# Altium PCB rev.PcbDoc
Units mm, origin at the board's own origin, x right, y up, seen from the top; angles counter-clockwise.
Board outline 145 x 50 mm, 2 copper layers (Top Layer, Bottom Layer); 30 components, 27 nets, 104 pads, 26 vias.
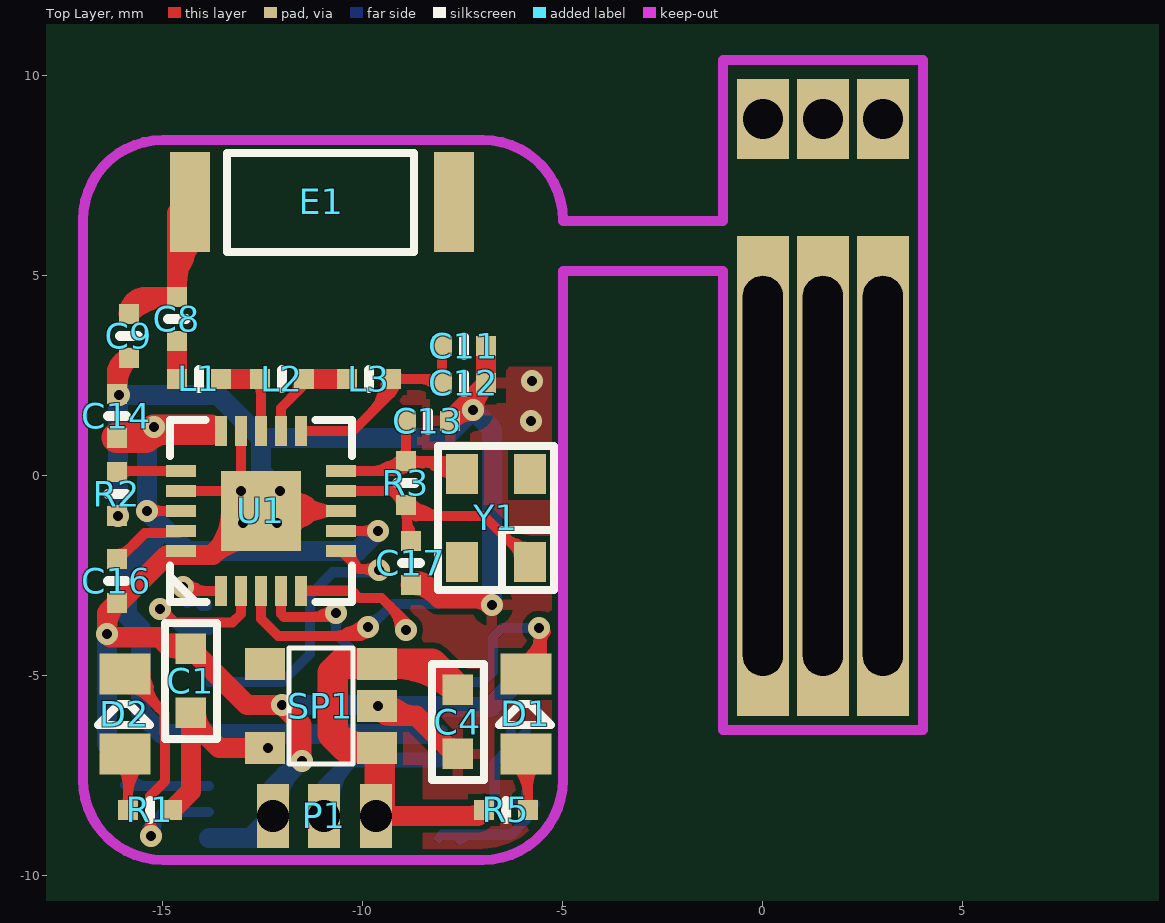
[diagram p0: Top Layer view]
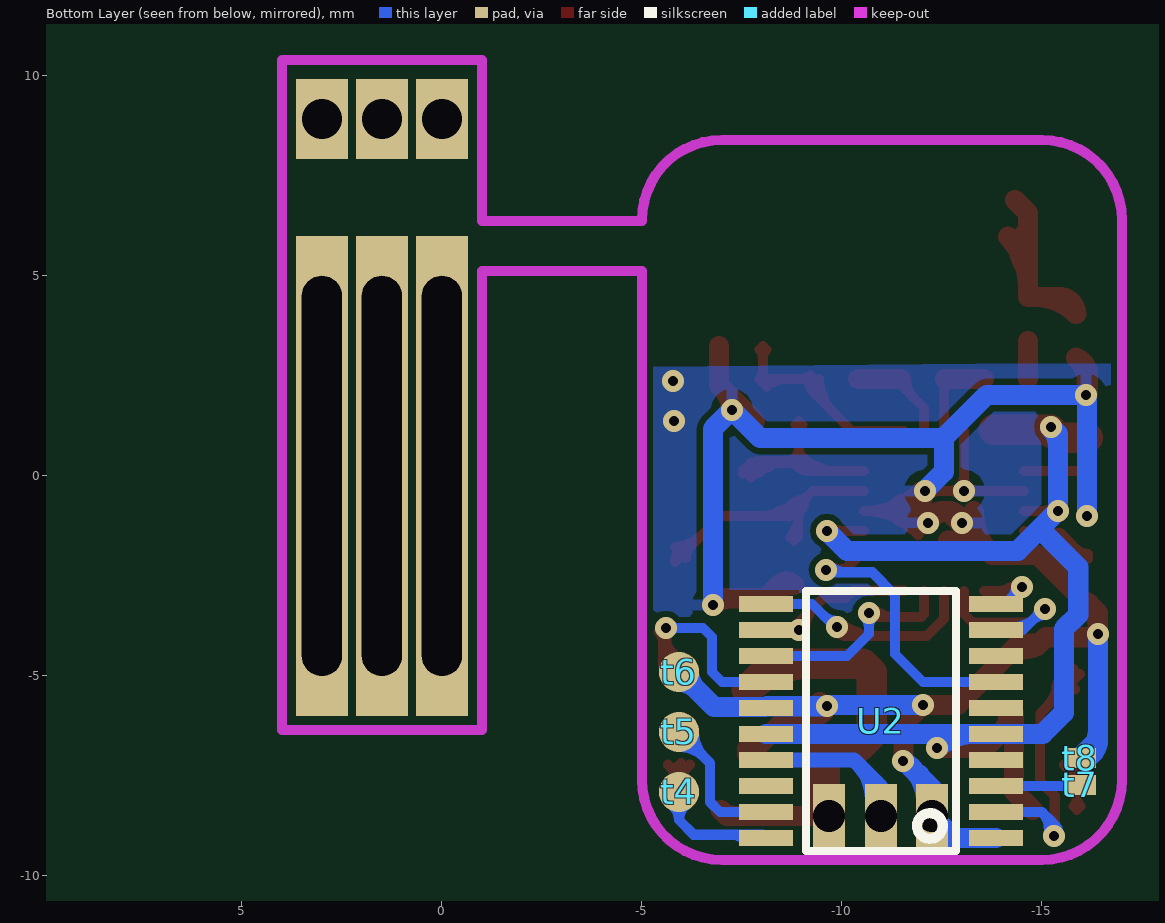
[diagram p1: Bottom Layer view, seen from below]

## Layer stack, top to bottom
Top Layer: signal copper 0.0356
Dielectric: dielectric 0.32, FR-4, Dk 4.8
Bottom Layer: signal copper 0.0356

## Board outline
-22,-14.6 -22,35.4 123,35.4 123,-14.6

## Design rules (kind name [scope] priority, off if disabled: settings)
AssemblyTestPointUsage [All] p1 off:
AssemblyTestpoint [All] p1 off: testpointundercomponent=TRUE minsize=1.016 maxsize=2.54 preferedsize=1.524 minholesize=0 maxholesize=1.016 preferedholesize=0.813 testpointgrid=0.025 usegrid=TRUE gridtolerance=0 allowsidetop=TRUE allowsidebottom=TRUE
Clearance [All] p1: gap=0.152
ComponentClearance [All] p1 off: gap=0.254 collisioncheckmode=3 verticalgap=0.254 showdistances=FALSE
FabricationTestPointUsage [All] p1 off: valid=0 allowmultiple=FALSE
FabricationTestpoint [All] p1 off: side=3 testpointundercomponent=TRUE minsize=1.016 maxsize=2.54 preferedsize=1.524 minholesize=0 maxholesize=1.016 preferedholesize=0.813 testpointgrid=0.025 allowsidetop=TRUE allowsidebottom=TRUE usegrid=TRUE gridtolerance=0
Height [All] p1 off: minheight=0 maxheight=25.4 prefheight=12.7
HoleToHoleClearance [All] p1: gap=0.254 allowstackedmicrovias=FALSE
MinimumSolderMaskSliver [All] p1 off: minsoldermaskwidth=0.254
PolygonConnect [All] p1: connectstyle=Relief reliefconductorwidth=0.254 reliefentries=4 polygonreliefangle="90 Angle" airgapwidth=0.254
RoutingVias [All] p1: holewidth=0.25 width=0.55 viastyle="Through Hole" minholewidth=0.25 minwidth=0.55 maxholewidth=0.711 maxwidth=1.27
SilkToSilkClearance [All] p1 off: silktosilkclearance=0.254
SilkToSolderMaskClearance [IsPad] p1 off: minsilkscreentomaskgap=0.254 clearancetoexposedcopper=TRUE
SolderMaskExpansion [All] p1: expansion=0.102
Width [All] p1: maxlimit=2.54 minlimit=0.178 preferedwidth=0.178 minimp=50.000000 maximp=50.000000 favimp=50.000000
18 further rules are at their usual default settings.

## Components (designator, comment, footprint, x,y, rotation, side; value= is the part's Value field where it differs from the comment)
C1 "22uf" 0603R -14.3,-5.925 r90 top
C4 "22uf" 0603R -7.625,-5.35 r270 top
C8 "1.5pF" 0402 -14.65,3.375 r90 top
C9 "1.0pF" 0402 -15.85,2.95 r90 top
C11 "2.2nF" 0402 -6.925,3.25 r180 top
C12 "4.7pF" 0402 -6.925,2.325 r180 top
C13 "22pF" 0402 -7.825,1.375 r180 top
C14 "10nF" 0402 -16.15,2.05 r270 top
C16 "33nF" 0402 -16.15,-3.175 r90 top
C17 "22pF" 0402 -8.8,-2.725 r90 top
D1 "LED-R" LED -5.925,-6.95 r90 top
D2 "LED-G" LED -15.95,-6.95 r90 top
E1 "Antenna" ANT6520 -14.325,6.85 r0 top
L1 "3.9nH" 0402 -13.55,2.425 r180 top
L2 "8.2nH" 0402 -11.475,2.425 r180 top
L3 "2.7nH" 0402 -9.3,2.425 r180 top
P1 "head*3" "head*3 - duplicate" -13.85,-7.2 r90 top
R1 "R1K" 0402 -14.775,-8.35 r180 top
R2 "22K" 0402 -16.15,0.1 r270 top
R3 "R1M" 0402 -8.925,0.375 r270 top
R5 "R1K" 0402 -6.975,-8.35 r0 top
SP1 "SP6201-adj" SOT23-5 -9.65,-6.8 r90 top
t4 "TP" TESTPOINT#1 -2.9,-8.275 r0 top
t5 "TP" TESTPOINT#2 -5.9,-6.675 r180 bottom
t6 "TP" TESTPOINT#3 -0.175,-3.875 r0 top
t7 "TP" TESTPOINT#4 4.9,-13.175 r0 top
t8 "TP" TESTPOINT#5 2.925,-8.725 r0 top
U1 "NRF24l01" QFN20-4X4 -13.55,-2.875 r90 top
U2 "STM32F030F3" TSSOP20 -13.85,-9.05 r90 bottom
Y1 "16M" XTAL3225 -5.525,-2.55 r90 top

## Footprints (in the part's own frame and the unit in brackets; to place one, negate y for a bottom-side part, rotate by r counter-clockwise, add the part's x,y. Pads: shape width x height; smd on the part's side, far side on the other; paste and mask are expansions set on the pad)
0402 [mm]
  rect 0.5x0.5 smd: 1(0,0) 2(1.1,0)
  silkscreen extent 0.55,-0.23 0.55,0.23
0603R [mil]
  rect 30x30 smd: 1(0,0) 2(62.99,0)
  silkscreen extent -26,-26 89,26
ANT6520 [mm]
  rect 1x2.5 smd: 1(0,0) 2(6.6,0)
  silkscreen extent 0.92,-1.25 5.6,1.22
"head*3 - duplicate" [mm]
  rect 1.6x0.8 hole 0.8: 1(-1.3,-1.6) 2(-1.3,-2.875) 3(-1.3,-4.175)
LED [mil]
  rect 40x50 smd: 1(0,0) 2(78.74,0)
  silkscreen extent 29,-25 49,27
QFN20-4X4 [mm]
  rect 2x2 smd: 0(2,-1)
  rect 0.75x0.3 smd: 1(0,0) 2(0,-0.5) 3(0,-1) 4(0,-1.5) 5(0,-2) 11(4,-2) 12(4,-1.5) 13(4,-1) 14(4,-0.5) 15(4,0)
  rect 0.3x0.75 smd: 6(1,-3) 7(1.5,-3) 8(2,-3) 9(2.5,-3) 10(3,-3) 16(3,1) 17(2.5,1) 18(2,1) 19(1.5,1) 20(1,1)
  silkscreen extent -0.28,-3.27 4.27,1.28
SOT23-5 [mm]
  rect 0.8x1 smd: 1(0,0) 2(1.05,0) 3(2.1,0) 4(2.1,2.8) 5(0,2.8)
  silkscreen extent -0.4,0.6 2.5,2.2
TESTPOINT#1 [mm]
  round 1 smd far side: 1(-3.025,0.375)
TESTPOINT#2 [mm]
  round 1 smd: 1(0.025,0.275)
TESTPOINT#3 [mm]
  round 1 smd far side: 1(-5.75,-1.025)
TESTPOINT#4 [mm]
  rect 0.8x0.5 smd far side: 1(-20.85,5.45)
TESTPOINT#5 [mm]
  rect 0.8x0.5 smd far side: 1(-18.875,1.675)
TSSOP20 [mm]
  rect 0.4x1.35 smd: 1(0,0) 2(0.65,0) 3(1.3,0) 4(1.95,0) 5(2.6,0) 6(3.25,0) 7(3.9,0) 8(4.55,0) 9(5.2,0) 10(5.85,0) 11(5.85,5.75) 12(5.2,5.75) 13(4.55,5.75) 14(3.9,5.75) 15(3.25,5.75) 16(2.6,5.75) 17(1.95,5.75) 18(1.3,5.75) 19(0.65,5.75) 20(0,5.75)
  silkscreen extent -0.33,1 6.17,4.75
XTAL3225 [mm]
  rect 1x0.8 smd: 1(0.4,0.3) 2(2.6,0.3) 3(2.6,2) 4(0.4,2)
  silkscreen extent -0.3,-0.3 3.3,2.6

## Part data
C1 C4: library part C100uF
C8 C9 C11 C12 C13 C14 C16 C17: library part C0.1uF
D1 D2: library part LED
E1: "Generic Antenna"
L1 L2 L3: library part Inductor-100uH
R2 R3: library part R10K
SP1: library part SP6201
U2: library part STM32F030F4
Y1: library part CRYSTAL, "Crystal"

## Free pads (board coordinates)
  rect 1.3x12 hole 1 slot 10 at 90 deg: 0(0,0) 0(1.5,0) 0(3,0)
  rect 1.3x2 hole 1: 3(0,8.925) 4(1.5,8.925) 5(3,8.925)

## Via types
v1: diameter 0.55, hole 0.25, Top Layer to Bottom Layer, tented both sides, 24 vias
v2: diameter 0.55, hole 0.25, Top Layer to Bottom Layer, 2 vias

## Nets (pads, with @x,y where several pads share a name; then routed paths per layer and width w, separated by ;. In a path a pad name is that pad's centre, name@x,y a point inside that pad or via, vN(x,y) a via of type N, cw(c..) or ccw(c..) an arc to the next point about the centre after c; other vN are vias at no path point)
4V3: C4.1 P1.3 R5.1 SP1.1 SP1.3 | length 20.4
  Top Layer w0.254: R5.1 R5.1@-6.965,-8.34
  Top Layer w0.508: P1.3 -7.125,-8.5 R5.1 ; -7.328,-8.5 ccw(c-7.328,-7.998) R5.1@-6.972,-8.353 ; -7.328,-8.5 ccw(c-7.328,-7.998) R5.1@-6.972,-8.353 ; -7.328,-8.5 ccw(c-7.328,-7.998) R5.1@-6.972,-8.353
  Top Layer w0.762: P1.3@-9.675,-8.4 -9.575,-8.3 -9.575,-6.8 -10.4,-6.8 -10.75,-6.45 ; -10.75,-6.45 ccw(c-9.921,-5.621) SP1.1@-9.753,-6.781 ; -10.75,-6.45 ccw(c-9.921,-5.621) SP1.1@-9.753,-6.781 ; -10.75,-6.45 ccw(c-9.921,-5.621) SP1.1@-9.753,-6.781 ; -10.75,-6.45 -10.75,-4.925 -10.525,-4.7 -8.275,-4.7 C4.1 ; SP1.3@-9.194,-4.7 cw(c-9.194,-6.919) C4.1 ; SP1.3@-9.194,-4.7 cw(c-9.194,-6.919) C4.1 ; SP1.3@-9.194,-4.7 cw(c-9.194,-6.919) C4.1
AD-BAT: U2.6
CE: U1.1 U2.10 | length 9.2
  Top Layer w0.254: v1(-14.5,-2.775) -14.4,-2.875 U1.1 ; v1@-14.395,-2.67 ccw(c-13.901,-2.176) -13.901,-2.875 ; v1@-14.395,-2.67 ccw(c-13.901,-2.176) -13.901,-2.875 ; v1@-14.395,-2.67 ccw(c-13.901,-2.176) -13.901,-2.875 ; v1@-14.379,-2.86 cw(c-14.239,-2.958) -14.154,-2.81 ; v1@-14.379,-2.86 cw(c-14.239,-2.958) -14.154,-2.81 ; v1@-14.379,-2.86 cw(c-14.239,-2.958) -14.154,-2.81
  Bottom Layer w0.254: U2.10@-13.9,-3.25 -14.025,-3.25 v1(-14.5,-2.775) ; v1@-14.502,-2.881 cw(c-14.624,-3.093) U2.10@-14.394,-3.175 ; v1@-14.502,-2.881 cw(c-14.624,-3.093) U2.10@-14.394,-3.175 ; v1@-14.502,-2.881 cw(c-14.624,-3.093) U2.10@-14.394,-3.175 ; v1@-14.5,-2.923 cw(c-14.5,-3.28) U2.10@-14.247,-3.028 ; v1@-14.5,-2.923 cw(c-14.5,-3.28) U2.10@-14.247,-3.028 ; v1@-14.5,-2.923 cw(c-14.5,-3.28) U2.10@-14.247,-3.028 ; v1(-14.5,-2.775) cw(c-14.791,-3.066) U2.10@-14.395,-3.18 ; v1(-14.5,-2.775) cw(c-14.791,-3.066) U2.10@-14.395,-3.18 ; v1(-14.5,-2.775) cw(c-14.791,-3.066) U2.10@-14.395,-3.18 ; v1@-14.39,-2.852 ccw(c-13.973,-2.859) U2.10@-14.273,-3.149 ; v1@-14.39,-2.852 ccw(c-13.973,-2.859) U2.10@-14.273,-3.149 ; v1@-14.39,-2.852 ccw(c-13.973,-2.859) U2.10@-14.273,-3.149 ; v1@-14.352,-2.775 ccw(c-13.995,-2.775) U2.10@-14.247,-3.028 ; v1@-14.352,-2.775 ccw(c-13.995,-2.775) U2.10@-14.247,-3.028 ; v1@-14.352,-2.775 ccw(c-13.995,-2.775) U2.10@-14.247,-3.028
CSN: U1.2 U2.9 | length 10.4
  Top Layer w0.254: v1@-15.062,-3.313 -14.71,-3.665 -13.265,-3.665 -13.05,-3.45 U1.2 ; v1@-15.075,-3.473 cw(c-15.075,-3.891) -14.78,-3.595 ; v1@-15.075,-3.473 cw(c-15.075,-3.891) -14.78,-3.595 ; v1@-15.075,-3.473 cw(c-15.075,-3.891) -14.78,-3.595 ; v1@-14.927,-3.325 ccw(c-14.63,-3.325) -14.84,-3.535 ; v1@-14.927,-3.325 ccw(c-14.63,-3.325) -14.84,-3.535 ; v1@-14.927,-3.325 ccw(c-14.63,-3.325) -14.84,-3.535
  Bottom Layer w0.254: v1@-15.062,-3.313 -14.525,-3.85 U2.9 ; -14.541,-3.734 ccw(c-14.406,-3.599) U2.9@-14.347,-3.781 ; v1@-15.075,-3.473 cw(c-15.075,-3.891) -14.78,-3.595 ; v1@-15.075,-3.473 cw(c-15.075,-3.891) -14.78,-3.595 ; v1@-15.075,-3.473 cw(c-15.075,-3.891) -14.78,-3.595 ; v1@-14.927,-3.325 ccw(c-14.63,-3.325) -14.84,-3.535 ; v1@-14.927,-3.325 ccw(c-14.63,-3.325) -14.84,-3.535 ; v1@-14.927,-3.325 ccw(c-14.63,-3.325) -14.84,-3.535 ; -14.791,-3.584 ccw(c-14.325,-3.118) U2.9@-14.325,-3.777 ; -14.791,-3.584 ccw(c-14.325,-3.118) U2.9@-14.325,-3.777 ; -14.791,-3.584 ccw(c-14.325,-3.118) U2.9@-14.325,-3.777 ; -14.641,-3.692 cw(c-14.749,-4.095) U2.9@-14.388,-3.887 ; -14.641,-3.692 cw(c-14.749,-4.095) U2.9@-14.388,-3.887 ; -14.641,-3.692 cw(c-14.749,-4.095) U2.9@-14.388,-3.887
  other v1: -15.075,-3.325
GND: C1.2 C4.2 C9.1 C11.1 C12.1 C13.1 C14.1 C16.1 C17.1 P1.1 R2.2 SP1.2 t6.1 t8.1 U1.0 U1.8 U1.14 U1.17 U1.20 U2.1 U2.15 | length 186.3
  Top Layer w0.254: R2.2 v1(-16.125,-1) ; U1.17 v1(-13.05,-0.375) ; U1.14 v1(-13.05,-0.375) ; U1.0@-13.407,-0.375 ccw(c-13.407,-0.018) U1.0@-13.155,-0.27 ; U1.0@-13.407,-0.375 cw(c-13.407,-0.732) U1.0@-13.155,-0.48 ; U1.0@-13.407,-0.375 ccw(c-13.407,-0.018) U1.0@-13.155,-0.27 ; U1.0@-13.407,-0.375 cw(c-13.407,-0.732) U1.0@-13.155,-0.48 ; U1.0@-13.407,-0.375 ccw(c-13.407,-0.018) U1.0@-13.155,-0.27 ; U1.0@-13.407,-0.375 cw(c-13.407,-0.732) U1.0@-13.155,-0.48 ; U1.0@-13.155,-0.27 ccw(c-13.407,-0.018) U1.0@-13.05,-0.018 ; U1.0@-13.155,-0.27 ccw(c-13.407,-0.018) U1.0@-13.05,-0.018 ; U1.0@-13.155,-0.27 ccw(c-13.407,-0.018) U1.0@-13.05,-0.018 ; v1(-13.05,-0.375) v1(-12.075,-0.375) U1.0@-12.075,-0.875 ; U1.0@-13.05,-0.018 ccw(c-12.693,-0.018) U1.0@-12.945,-0.27 ; U1.0@-13.05,-0.018 ccw(c-12.693,-0.018) U1.0@-12.945,-0.27 ; U1.0@-13.05,-0.018 ccw(c-12.693,-0.018) U1.0@-12.945,-0.27 ; U1.0@-12.945,-0.48 cw(c-12.693,-0.732) U1.0@-12.693,-0.375 ; U1.0@-12.945,-0.48 cw(c-12.693,-0.732) U1.0@-12.693,-0.375 ; U1.0@-12.945,-0.48 cw(c-12.693,-0.732) U1.0@-12.693,-0.375 ; U1.0@-12.945,-0.27 ccw(c-12.693,-0.018) U1.0@-12.693,-0.375 ; U1.0@-12.945,-0.27 ccw(c-12.693,-0.018) U1.0@-12.693,-0.375 ; U1.0@-12.945,-0.27 ccw(c-12.693,-0.018) U1.0@-12.693,-0.375 ; U1.0@-12.432,-0.375 ccw(c-12.432,-0.018) U1.0@-12.18,-0.27 ; U1.0@-12.432,-0.375 cw(c-12.432,-0.732) U1.0@-12.18,-0.48 ; U1.0@-12.432,-0.375 ccw(c-12.432,-0.018) U1.0@-12.18,-0.27 ; U1.0@-12.432,-0.375 cw(c-12.432,-0.732) U1.0@-12.18,-0.48 ; U1.0@-12.432,-0.375 ccw(c-12.432,-0.018) U1.0@-12.18,-0.27 ; U1.0@-12.432,-0.375 cw(c-12.432,-0.732) U1.0@-12.18,-0.48 ; U1.0@-12.254,-1.07 ccw(c-12.688,-0.637) U1.0@-12.075,-0.637 ; U1.0@-12.254,-1.07 ccw(c-12.688,-0.637) U1.0@-12.075,-0.637 ; U1.0@-12.254,-1.07 ccw(c-12.688,-0.637) U1.0@-12.075,-0.637 ; U1.0@-12.234,-1.11 cw(c-11.793,-1.45) U1.0@-11.864,-0.898 ; U1.0@-12.234,-1.11 cw(c-11.793,-1.45) U1.0@-11.864,-0.898 ; U1.0@-12.234,-1.11 cw(c-11.793,-1.45) U1.0@-11.864,-0.898 ; U1.0@-12.234,-1.11 cw(c-11.793,-1.45) U1.0@-11.864,-0.898 ; U1.0@-12.234,-1.11 cw(c-11.793,-1.45) U1.0@-11.864,-0.898 ; U1.0@-12.234,-1.11 cw(c-11.793,-1.45) U1.0@-11.864,-0.898 ; U1.0@-12.225,-1.1 cw(c-11.682,-1.642) U1.0@-11.682,-0.875 ; U1.0@-12.225,-1.1 cw(c-11.682,-1.642) U1.0@-11.682,-0.875 ; U1.0@-12.225,-1.1 cw(c-11.682,-1.642) U1.0@-11.682,-0.875 ; U1.0@-12.217,-1.257 ccw(c-11.915,-0.888) U1.0@-11.649,-1.283 ; U1.0@-12.217,-1.257 ccw(c-11.915,-0.888) U1.0@-11.649,-1.283 ; U1.0@-12.217,-1.257 ccw(c-11.915,-0.888) U1.0@-11.649,-1.283 ; U1.0@-12.217,-1.257 ccw(c-11.915,-0.888) U1.0@-11.649,-1.283 ; U1.0@-12.217,-1.257 ccw(c-11.915,-0.888) U1.0@-11.649,-1.283 ; U1.0@-12.217,-1.257 ccw(c-11.915,-0.888) U1.0@-11.649,-1.283 ; U1.0@-12.195,-0.462 cw(c-12.546,-0.717) U1.0@-12.127,-0.83 ; U1.0@-12.195,-0.462 cw(c-12.546,-0.717) U1.0@-12.127,-0.83 ; U1.0@-12.195,-0.462 cw(c-12.546,-0.717) U1.0@-12.127,-0.83 ; U1.0@-12.192,-1.033 ccw(c-12.24,-0.875) U1.0@-12.075,-0.875 ; U1.0@-12.192,-1.033 ccw(c-12.24,-0.875) U1.0@-12.075,-0.875 ; U1.0@-12.192,-1.033 ccw(c-12.24,-0.875) U1.0@-12.075,-0.875 ; U1.0@-12.18,-0.48 cw(c-12.432,-0.732) U1.0@-12.075,-0.732 ; U1.0@-12.18,-0.48 cw(c-12.432,-0.732) U1.0@-12.075,-0.732 ; U1.0@-12.18,-0.48 cw(c-12.432,-0.732) U1.0@-12.075,-0.732 ; U1.0@-12.107,-1.033 ccw(c-11.883,-0.297) -11.498,-0.963 ; U1.0@-12.107,-1.033 ccw(c-11.883,-0.297) -11.498,-0.963 ; U1.0@-12.107,-1.033 ccw(c-11.883,-0.297) -11.498,-0.963 ; U1.0@-12.104,-1.034 ccw(c-11.91,-0.432) U1.0@-11.573,-0.967 ; U1.0@-12.104,-1.034 ccw(c-11.91,-0.432) U1.0@-11.573,-0.967 ; U1.0@-12.104,-1.034 ccw(c-11.91,-0.432) U1.0@-11.573,-0.967 ; U1.0@-12.104,-1.034 ccw(c-11.91,-0.432) U1.0@-11.573,-0.967 ; U1.0@-12.104,-1.034 ccw(c-11.91,-0.432) U1.0@-11.573,-0.967 ; U1.0@-12.104,-1.034 ccw(c-11.91,-0.432) U1.0@-11.573,-0.967 ; U1.0@-12.096,-1.296 cw(c-11.132,-2.19) -11.132,-0.875 ; U1.0@-12.096,-1.296 cw(c-11.132,-2.19) -11.132,-0.875 ; U1.0@-12.096,-1.296 cw(c-11.132,-2.19) -11.132,-0.875 ; U1.0@-12.096,-0.454 ccw(c-11.132,0.44) -11.132,-0.875 ; U1.0@-12.096,-0.454 ccw(c-11.132,0.44) -11.132,-0.875 ; U1.0@-12.096,-0.454 ccw(c-11.132,0.44) -11.132,-0.875 ; U1.0@-12.075,-0.875 U1.8 ; U1.0@-12.075,-0.732 cw(c-11.718,-0.732) U1.0@-11.97,-0.48 ; U1.0@-12.075,-0.732 cw(c-11.718,-0.732) U1.0@-11.97,-0.48 ; U1.0@-12.075,-0.732 cw(c-11.718,-0.732) U1.0@-11.97,-0.48 ; U1.0@-12.068,-0.523 cw(c-12.052,-0.882) U1.0@-11.734,-0.714 ; U1.0@-12.068,-0.523 cw(c-12.052,-0.882) U1.0@-11.734,-0.714 ; U1.0@-12.068,-0.523 cw(c-12.052,-0.882) U1.0@-11.734,-0.714 ; U1.0@-12.068,-0.523 cw(c-12.052,-0.882) U1.0@-11.734,-0.714 ; U1.0@-12.056,-1.06 ccw(c-11.689,-0.612) -11.366,-1.092 ; U1.0@-12.056,-1.06 ccw(c-11.689,-0.612) -11.366,-1.092 ; U1.0@-12.056,-1.06 ccw(c-11.689,-0.612) -11.366,-1.092 ; U1.0@-12.056,-1.06 ccw(c-11.689,-0.612) -11.366,-1.092 ; U1.0@-12.056,-1.06 ccw(c-11.689,-0.612) -11.366,-1.092 ; U1.0@-12.056,-1.06 ccw(c-11.689,-0.612) -11.366,-1.092 ; U1.0@-12.045,-1.279 cw(c-11.069,-2.255) -11.069,-0.875 ; U1.0@-12.045,-1.279 cw(c-11.069,-2.255) -11.069,-0.875 ; U1.0@-12.045,-1.279 cw(c-11.069,-2.255) -11.069,-0.875 ; U1.0@-12.044,-0.52 cw(c-11.848,-1.43) -11.342,-0.648 ; U1.0@-12.044,-0.52 cw(c-11.848,-1.43) -11.342,-0.648 ; U1.0@-12.044,-0.52 cw(c-11.848,-1.43) -11.342,-0.648 ; U1.0@-12.044,-0.52 cw(c-11.848,-1.43) -11.342,-0.648 ; U1.0@-12.044,-0.52 cw(c-11.848,-1.43) -11.342,-0.648 ; U1.0@-12.044,-0.52 cw(c-11.848,-1.43) -11.342,-0.648 ; U1.0@-12.002,-1.176 cw(c-11.646,-1.178) U1.0@-11.823,-0.87 ; U1.0@-12.002,-1.176 cw(c-11.646,-1.178) U1.0@-11.823,-0.87 ; U1.0@-12.002,-1.176 cw(c-11.646,-1.178) U1.0@-11.823,-0.87 ; U1.0@-11.931,-0.342 ccw(c-11.322,-0.203) U1.0@-11.654,-0.732 ; U1.0@-11.931,-0.342 ccw(c-11.322,-0.203) U1.0@-11.654,-0.732 ; U1.0@-11.931,-0.342 ccw(c-11.322,-0.203) U1.0@-11.654,-0.732 ; U1.0@-11.931,-0.342 ccw(c-11.322,-0.203) U1.0@-11.654,-0.732 ; U1.0@-11.931,-0.342 ccw(c-11.322,-0.203) U1.0@-11.654,-0.732 ; U1.0@-11.931,-0.342 ccw(c-11.322,-0.203) U1.0@-11.654,-0.732 ; U1.0@-11.91,-1.469 cw(c-10.55,-2.729) U1.8 ; U1.0@-11.91,-1.469 cw(c-10.55,-2.729) U1.8 ; U1.0@-11.91,-1.469 cw(c-10.55,-2.729) U1.8 ; U1.0@-11.91,-0.281 ccw(c-10.55,0.979) U1.8 ; U1.0@-11.91,-0.281 ccw(c-10.55,0.979) U1.8 ; U1.0@-11.91,-0.281 ccw(c-10.55,0.979) U1.8 ; U1.0@-12.02,-1.103 cw(c-11.894,-1.033) -11.982,-0.918 ccw(c-11.894,-1.033) U1.0@-12.02,-1.103
  Top Layer w0.508: C14.1 -16.15,2.65 C9.1 ; v1(-11.523,-7.131) -11.537,-7.117 -11.537,-6.213 v1(-12.025,-5.725) -12.9,-5.725 C1.2 -14.427,-4.198 -14.931,-4.198 ; SP1.2@-9.575,-5.75 SP1.2@-9.331,-5.994 ; C17.1 -8.425,-2.725 ; C13.1 -6.925,2.275 C12.1 C11.1 ; C4.2 -7.712,-6.95 -8.669,-5.994 ; v1(-6.775,-3.225) -6.944,-3.056 -8.093,-3.056 -8.425,-2.725 ; v1@-16.4,-3.769 cw(c-15.556,-3.769) C16.1@-16.153,-3.172 ; v1@-16.4,-3.769 cw(c-15.556,-3.769) C16.1@-16.153,-3.172 ; v1@-16.4,-3.769 cw(c-15.556,-3.769) C16.1@-16.153,-3.172 ; v1@-16.379,-3.946 cw(c-15.553,-3.772) C16.1 ; v1@-16.379,-3.946 cw(c-15.553,-3.772) C16.1 ; v1@-16.379,-3.946 cw(c-15.553,-3.772) C16.1 ; C16.1 -16.4,-3.425 v1(-16.4,-3.95) -16.314,-4.036 -15.094,-4.036 -14.931,-4.198 ; C16.1 -16.096,-3.175 -14.896,-1.975 -13.75,-1.975 ; C14.1@-16.15,2.235 cw(c-15.135,2.235) C9.1@-15.853,2.953 ; C14.1@-16.15,2.235 cw(c-15.135,2.235) C9.1@-15.853,2.953 ; C14.1@-16.15,2.235 cw(c-15.135,2.235) C9.1@-15.853,2.953 ; -16.15,2.526 cw(c-15.694,2.526) C9.1@-15.851,2.954 ; -16.15,2.526 cw(c-15.694,2.526) C9.1@-15.851,2.954 ; -16.15,2.526 cw(c-15.694,2.526) C9.1@-15.851,2.954 ; -16.122,2.34 ccw(c-15.734,2.236) C14.1@-16.082,2.035 ; -16.122,2.34 ccw(c-15.734,2.236) C14.1@-16.082,2.035 ; -16.122,2.34 ccw(c-15.734,2.236) C14.1@-16.082,2.035 ; -16.122,2.34 ccw(c-15.734,2.236) C14.1@-16.082,2.035 ; -16.122,2.34 ccw(c-15.734,2.236) C14.1@-16.082,2.035 ; -16.122,2.34 ccw(c-15.734,2.236) C14.1@-16.082,2.035 ; -14.931,-4.198 ccw(c-14.64,-3.907) C1.2@-14.38,-4.226 ; -14.931,-4.198 ccw(c-14.64,-3.907) C1.2@-14.38,-4.226 ; -14.931,-4.198 ccw(c-14.64,-3.907) C1.2@-14.38,-4.226 ; -14.913,-4.198 cw(c-14.913,-4.938) C1.2@-14.39,-4.415 ; -14.913,-4.198 cw(c-14.913,-4.938) C1.2@-14.39,-4.415 ; -14.913,-4.198 cw(c-14.913,-4.938) C1.2@-14.39,-4.415 ; -13.75,-1.975 ccw(c-14.845,-0.88) U1.0@-13.296,-0.877 ; -13.75,-1.975 cw(c-12.844,-2.881) U1.0@-12.658,-1.613 ; -13.75,-1.975 ccw(c-14.845,-0.88) U1.0@-13.296,-0.877 ; -13.75,-1.975 cw(c-12.844,-2.881) U1.0@-12.658,-1.613 ; -13.75,-1.975 ccw(c-14.845,-0.88) U1.0@-13.296,-0.877 ; -13.75,-1.975 cw(c-12.844,-2.881) U1.0@-12.658,-1.613 ; -13.75,-1.975 U1.0@-12.65,-0.875 ; U1.0@-12.98,-1.182 cw(c-12.55,-1.33) U1.0 ; U1.0@-12.98,-1.182 cw(c-12.55,-1.33) U1.0 ; U1.0@-12.98,-1.182 cw(c-12.55,-1.33) U1.0 ; U1.0@-12.979,-1.177 cw(c-12.65,-1.206) U1.0@-12.65,-0.875 ; U1.0@-12.979,-1.177 cw(c-12.65,-1.206) U1.0@-12.65,-0.875 ; U1.0@-12.979,-1.177 cw(c-12.65,-1.206) U1.0@-12.65,-0.875 ; U1.0@-12.65,-0.875 cw(c-12.65,-1.404) U1.0@-12.169,-1.183 ; U1.0@-12.65,-0.875 cw(c-12.65,-1.404) U1.0@-12.169,-1.183 ; U1.0@-12.65,-0.875 cw(c-12.65,-1.404) U1.0@-12.169,-1.183 ; U1.0@-12.65,-0.875 U1.0 ; U1.0 cw(c-12.55,-1.264) U1.0@-12.17,-1.179 ; U1.0 cw(c-12.55,-1.264) U1.0@-12.17,-1.179 ; U1.0 cw(c-12.55,-1.264) U1.0@-12.17,-1.179 ; SP1.2@-9.621,-5.771 cw(c-9.478,-6.426) -9.115,-5.861 ; SP1.2@-9.621,-5.771 cw(c-9.478,-6.426) -9.115,-5.861 ; SP1.2@-9.621,-5.771 cw(c-9.478,-6.426) -9.115,-5.861 ; SP1.2@-9.621,-5.771 cw(c-9.478,-6.426) -9.115,-5.861 ; SP1.2@-9.621,-5.771 cw(c-9.478,-6.426) -9.115,-5.861 ; SP1.2@-9.621,-5.771 cw(c-9.478,-6.426) -9.115,-5.861 ; SP1.2@-9.61,-5.735 ccw(c-8.986,-5.111) -8.986,-5.994 ; SP1.2@-9.61,-5.735 ccw(c-8.986,-5.111) -8.986,-5.994 ; SP1.2@-9.61,-5.735 ccw(c-8.986,-5.111) -8.986,-5.994 ; SP1.2@-9.604,-5.748 ccw(c-9.331,-5.719) SP1.2@-9.331,-5.994 ; SP1.2@-9.604,-5.748 ccw(c-9.331,-5.719) SP1.2@-9.331,-5.994 ; SP1.2@-9.604,-5.748 ccw(c-9.331,-5.719) SP1.2@-9.331,-5.994 ; SP1.2@-9.487,-5.882 cw(c-9.289,-6.295) -9.041,-5.909 ; SP1.2@-9.487,-5.882 cw(c-9.289,-6.295) -9.041,-5.909 ; SP1.2@-9.487,-5.882 cw(c-9.289,-6.295) -9.041,-5.909 ; SP1.2@-9.442,-5.652 ccw(c-8.669,-4.948) -8.669,-5.994 ; SP1.2@-9.442,-5.652 ccw(c-8.669,-4.948) -8.669,-5.994 ; SP1.2@-9.442,-5.652 ccw(c-8.669,-4.948) -8.669,-5.994 ; SP1.2@-9.331,-5.994 -8.669,-5.994 ; C17.1@-8.803,-2.722 cw(c-8.615,-2.915) -8.425,-2.725 ; C17.1@-8.803,-2.722 cw(c-8.615,-2.915) -8.425,-2.725 ; C17.1@-8.803,-2.722 cw(c-8.615,-2.915) -8.425,-2.725 ; C17.1@-8.8,-2.721 cw(c-8.8,-3.617) -8.166,-2.984 ; C17.1@-8.8,-2.721 cw(c-8.8,-3.617) -8.166,-2.984 ; C17.1@-8.8,-2.721 cw(c-8.8,-3.617) -8.166,-2.984 ; C4.2@-7.991,-6.672 ccw(c-7.625,-6.306) C4.2@-7.625,-6.823 ; C4.2@-7.991,-6.672 ccw(c-7.625,-6.306) C4.2@-7.625,-6.823 ; C4.2@-7.991,-6.672 ccw(c-7.625,-6.306) C4.2@-7.625,-6.823 ; C13.1@-7.798,1.402 cw(c-7.25,0.854) v1@-7.25,1.629 ; C13.1@-7.798,1.402 cw(c-7.25,0.854) v1@-7.25,1.629 ; C13.1@-7.798,1.402 cw(c-7.25,0.854) v1@-7.25,1.629 ; -7.233,-3.056 cw(c-7.233,-3.683) v1@-6.79,-3.24 ; -7.233,-3.056 cw(c-7.233,-3.683) v1@-6.79,-3.24 ; -7.233,-3.056 cw(c-7.233,-3.683) v1@-6.79,-3.24 ; v1@-7.229,1.65 cw(c-6.454,1.65) C12.1@-7.002,2.198 ; v1@-7.229,1.65 cw(c-6.454,1.65) C12.1@-7.002,2.198 ; v1@-7.229,1.65 cw(c-6.454,1.65) C12.1@-7.002,2.198
  Bottom Layer w0.254: v1@-16.125,2 v1(-16.1,2.025)
  Bottom Layer w0.508: v1(-16.4,-3.95) -16.4,-6.6 ; v1(-16.125,-1) v1@-16.125,2 ; v1(-16.1,2.025) -13.625,2.025 -12.55,0.95 ; t8.1 -16.4,-6.6 ; U2.1 -12.8,-9.05 ; P1.1@-12.111,-8.055 cw(c-11.748,-7.938) -12.018,-7.668 ; v1(-12.075,-0.375) -12.55,0.1 -12.55,0.95 ; v1(-12.025,-5.725) -9.65,-5.725 v1(-9.625,-5.75) -9.619,-5.756 U2.15@-8.133,-5.756 ; v1(-11.523,-7.131) -11.571,-7.131 -12.25,-7.81 P1.1 -12.8,-9.05 ; U2.15@-8.075,-5.775 -6.8,-5.775 t6.1 ; v1(-6.775,-3.225) -6.775,1.175 v1(-7.25,1.65) -7.95,0.95 -12.55,0.95 ; -16.4,-6.6 ccw(c-15.906,-6.6) t8.1@-16.102,-7.054 ; -16.4,-6.6 ccw(c-15.906,-6.6) t8.1@-16.102,-7.054 ; -16.4,-6.6 ccw(c-15.906,-6.6) t8.1@-16.102,-7.054 ; -16.4,-6.335 ccw(c-15.385,-6.335) t8.1@-16.103,-7.053 ; -16.4,-6.335 ccw(c-15.385,-6.335) t8.1@-16.103,-7.053 ; -16.4,-6.335 ccw(c-15.385,-6.335) t8.1@-16.103,-7.053 ; t8.1@-16.199,-6.801 cw(c-16.448,-7.05) t8.1@-16.096,-7.05 ; t8.1@-16.199,-6.801 cw(c-16.448,-7.05) t8.1@-16.096,-7.05 ; t8.1@-16.199,-6.801 cw(c-16.448,-7.05) t8.1@-16.096,-7.05 ; -12.965,-9.05 ccw(c-12.965,-8.185) P1.1@-12.353,-8.797 ; -12.965,-9.05 ccw(c-12.965,-8.185) P1.1@-12.353,-8.797 ; -12.965,-9.05 ccw(c-12.965,-8.185) P1.1@-12.353,-8.797 ; -12.8,-9.05 cw(c-12.55,-9.3) P1.1@-12.337,-9.017 ; -12.8,-9.05 ccw(c-12.8,-8.537) P1.1@-12.372,-8.82 ; -12.8,-9.05 cw(c-12.55,-9.3) P1.1@-12.337,-9.017 ; -12.8,-9.05 ccw(c-12.8,-8.537) P1.1@-12.372,-8.82 ; -12.8,-9.05 cw(c-12.55,-9.3) P1.1@-12.337,-9.017 ; -12.8,-9.05 ccw(c-12.8,-8.537) P1.1@-12.372,-8.82 ; -12.67,-8.98 cw(c-12.529,-9.224) P1.1@-12.345,-9.011 ; -12.67,-8.98 cw(c-12.529,-9.224) P1.1@-12.345,-9.011 ; -12.67,-8.98 cw(c-12.529,-9.224) P1.1@-12.345,-9.011 ; P1.1@-12.323,-7.974 ccw(c-12.74,-7.251) -11.934,-7.467 ; P1.1@-12.323,-7.974 ccw(c-12.74,-7.251) -11.934,-7.467 ; P1.1@-12.323,-7.974 ccw(c-12.74,-7.251) -11.934,-7.467 ; P1.1@-12.104,-8.1 cw(c-11.052,-8.1) -11.796,-7.356 ; P1.1@-12.104,-8.1 cw(c-11.052,-8.1) -11.796,-7.356 ; P1.1@-12.104,-8.1 cw(c-11.052,-8.1) -11.796,-7.356 ; -11.806,-7.373 cw(c-11.394,-7.61) v1@-11.517,-7.152 ; -11.806,-7.373 cw(c-11.394,-7.61) v1@-11.517,-7.152 ; -11.806,-7.373 cw(c-11.394,-7.61) v1@-11.517,-7.152 ; -11.806,-7.373 cw(c-11.394,-7.61) v1@-11.517,-7.152 ; -11.806,-7.373 cw(c-11.394,-7.61) v1@-11.517,-7.152 ; -11.806,-7.373 cw(c-11.394,-7.61) v1@-11.517,-7.152 ; -6.345,-5.32 ccw(c-6.765,-4.9) t6.1@-6.171,-4.9 ; -6.345,-5.32 cw(c-5.925,-5.74) t6.1@-5.925,-5.146 ; -6.345,-5.32 ccw(c-6.765,-4.9) t6.1@-6.171,-4.9 ; -6.345,-5.32 cw(c-5.925,-5.74) t6.1@-5.925,-5.146 ; -6.345,-5.32 ccw(c-6.765,-4.9) t6.1@-6.171,-4.9 ; -6.345,-5.32 cw(c-5.925,-5.74) t6.1@-5.925,-5.146
  other v1: -13,-1.175 -12.15,-1.175
  other v2: -5.8,1.375 -5.775,2.375
IRQ: U1.6 U2.7 | length 11.8
  Top Layer w0.254: U1.6 -10.1,-2.325 -9.624,-2.325 v1(-9.6,-2.35) ; U1.6@-10.302,-1.875 ccw(c-9.703,-1.875) -10.127,-2.298 ; U1.6@-10.302,-1.875 ccw(c-9.703,-1.875) -10.127,-2.298 ; U1.6@-10.302,-1.875 ccw(c-9.703,-1.875) -10.127,-2.298 ; -10.016,-2.325 cw(c-10.016,-2.766) v1@-9.704,-2.454 ; -10.016,-2.325 cw(c-10.016,-2.766) v1@-9.704,-2.454 ; -10.016,-2.325 cw(c-10.016,-2.766) v1@-9.704,-2.454 ; -9.897,-2.325 ccw(c-9.897,-2.052) v1@-9.704,-2.245 ; -9.897,-2.325 ccw(c-9.897,-2.052) v1@-9.704,-2.245 ; -9.897,-2.325 ccw(c-9.897,-2.052) v1@-9.704,-2.245
  Bottom Layer w0.254: U2.7 -12.025,-5.15 -11.325,-4.45 -11.325,-2.975 -10.758,-2.408 -9.658,-2.408 v1(-9.6,-2.35) ; -10.099,-2.408 ccw(c-10.099,-1.851) v1@-9.704,-2.245 ; -10.099,-2.408 ccw(c-10.099,-1.851) v1@-9.704,-2.245 ; -10.099,-2.408 ccw(c-10.099,-1.851) v1@-9.704,-2.245
KEY2: t7.1 U2.3 | length 3
  Bottom Layer w0.254: t7.1 -15.925,-7.75 U2.3 ; t7.1@-15.713,-7.638 ccw(c-15.443,-7.368) -15.443,-7.75 ; t7.1@-15.713,-7.638 ccw(c-15.443,-7.368) -15.443,-7.75 ; t7.1@-15.713,-7.638 ccw(c-15.443,-7.368) -15.443,-7.75
LED: D1.2 U2.14 | length 17.1
  Top Layer w0.254: D1.2@-5.975,-5.175 -5.525,-4.725 v1@-5.525,-3.8 ; D1.2@-5.993,-4.623 ccw(c-6.482,-3.8) v1@-5.525,-3.8 ; D1.2@-5.993,-4.623 ccw(c-6.482,-3.8) v1@-5.525,-3.8 ; D1.2@-5.993,-4.623 ccw(c-6.482,-3.8) v1@-5.525,-3.8 ; D1.2@-5.863,-4.841 ccw(c-6.216,-4.247) -5.525,-4.247 ; D1.2@-5.863,-4.841 ccw(c-6.216,-4.247) -5.525,-4.247 ; D1.2@-5.863,-4.841 ccw(c-6.216,-4.247) -5.525,-4.247 ; v1@-5.653,-3.874 cw(c-5.963,-4.053) -5.617,-4.145 ; v1@-5.653,-3.874 cw(c-5.963,-4.053) -5.617,-4.145 ; v1@-5.653,-3.874 cw(c-5.963,-4.053) -5.617,-4.145 ; v1@-5.653,-3.874 cw(c-5.963,-4.053) -5.617,-4.145 ; v1@-5.653,-3.874 cw(c-5.963,-4.053) -5.617,-4.145 ; v1@-5.653,-3.874 cw(c-5.963,-4.053) -5.617,-4.145 ; v1@-5.63,-3.905 cw(c-5.882,-4.157) -5.525,-4.157 ; v1@-5.63,-3.905 cw(c-5.882,-4.157) -5.525,-4.157 ; v1@-5.63,-3.905 cw(c-5.882,-4.157) -5.525,-4.157 ; -5.617,-4.145 cw(c-5.272,-4.238) v1@-5.451,-3.928 ; -5.617,-4.145 cw(c-5.272,-4.238) v1@-5.451,-3.928 ; -5.617,-4.145 cw(c-5.272,-4.238) v1@-5.451,-3.928 ; -5.617,-4.145 cw(c-5.272,-4.238) v1@-5.451,-3.928 ; -5.617,-4.145 cw(c-5.272,-4.238) v1@-5.451,-3.928 ; -5.617,-4.145 cw(c-5.272,-4.238) v1@-5.451,-3.928 ; -5.525,-4.157 cw(c-5.168,-4.157) v1@-5.42,-3.905 ; -5.525,-4.157 cw(c-5.168,-4.157) v1@-5.42,-3.905 ; -5.525,-4.157 cw(c-5.168,-4.157) v1@-5.42,-3.905
  Bottom Layer w0.254: U2.14 -7,-5.15 -6.75,-4.9 -6.75,-4.025 -6.525,-3.8 v1@-5.525,-3.8 ; -5.882,-3.8 ccw(c-5.882,-3.443) v1@-5.63,-3.695 ; -5.882,-3.8 cw(c-5.882,-4.157) v1@-5.63,-3.905 ; -5.882,-3.8 ccw(c-5.882,-3.443) v1@-5.63,-3.695 ; -5.882,-3.8 cw(c-5.882,-4.157) v1@-5.63,-3.905 ; -5.882,-3.8 ccw(c-5.882,-3.443) v1@-5.63,-3.695 ; -5.882,-3.8 cw(c-5.882,-4.157) v1@-5.63,-3.905
  other v1: -5.6,-3.8
LOWPOWER: D2.2 U2.2 | length 19.5
  Top Layer w0.254: D2.2 -14.96,-5.94 -14.96,-6.432 -14.95,-6.443 -14.95,-7.63 -15.321,-8.001 v1@-15.321,-8.984 ; D2.2@-15.823,-5.331 cw(c-15.823,-5.944) -15.389,-5.511 ; D2.2@-15.823,-5.331 cw(c-15.823,-5.944) -15.389,-5.511 ; D2.2@-15.823,-5.331 cw(c-15.823,-5.944) -15.389,-5.511 ; D2.2@-15.784,-4.829 cw(c-15.982,-5.449) D2.2@-15.353,-5.281 ; D2.2@-15.784,-4.829 cw(c-15.982,-5.449) D2.2@-15.353,-5.281 ; D2.2@-15.784,-4.829 cw(c-15.982,-5.449) D2.2@-15.353,-5.281 ; D2.2@-15.696,-4.95 ccw(c-15.083,-4.95) D2.2@-15.516,-5.384 ; D2.2@-15.696,-4.95 ccw(c-15.083,-4.95) D2.2@-15.516,-5.384 ; D2.2@-15.696,-4.95 ccw(c-15.083,-4.95) D2.2@-15.516,-5.384 ; D2.2@-15.442,-4.95 ccw(c-14.216,-4.95) -15.083,-5.817 ; D2.2@-15.442,-4.95 ccw(c-14.216,-4.95) -15.083,-5.817 ; D2.2@-15.442,-4.95 ccw(c-14.216,-4.95) -15.083,-5.817 ; v1@-15.405,-8.895 ccw(c-15.607,-8.693) -15.321,-8.693 ; v1@-15.405,-8.895 ccw(c-15.607,-8.693) -15.321,-8.693 ; v1@-15.405,-8.895 ccw(c-15.607,-8.693) -15.321,-8.693 ; -15.321,-8.593 ccw(c-14.893,-8.593) v1@-15.195,-8.895 ; -15.321,-8.593 ccw(c-14.893,-8.593) v1@-15.195,-8.895 ; -15.321,-8.593 ccw(c-14.893,-8.593) v1@-15.195,-8.895
  Bottom Layer w0.254: v1@-15.246,-8.984 -15.246,-8.646 ; U2.2 -15,-8.4 ; v1@-15.403,-9.026 cw(c-15.088,-8.947) -15.317,-8.717 ; v1@-15.403,-9.026 cw(c-15.088,-8.947) -15.317,-8.717 ; v1@-15.403,-9.026 cw(c-15.088,-8.947) -15.317,-8.717 ; v1@-15.375,-8.873 ccw(c-15.509,-8.646) -15.246,-8.646 ; v1@-15.375,-8.873 ccw(c-15.509,-8.646) -15.246,-8.646 ; v1@-15.375,-8.873 ccw(c-15.509,-8.646) -15.246,-8.646 ; -15.246,-8.646 -15,-8.4 ; v1@-15.156,-8.964 cw(c-14.58,-8.82) -15,-8.4 ; v1@-15.156,-8.964 cw(c-14.58,-8.82) -15,-8.4 ; v1@-15.156,-8.964 cw(c-14.58,-8.82) -15,-8.4
  other v1: -15.3,-9
NetC8_1: C8.1 L1.2 | length 1
  Top Layer w0.508: L1.2 C8.1
NetC8_2: C8.2 C9.2 E1.1 | length 15.5
  Top Layer w0.508: C9.2 -15.425,4.475 ; E1.1@-14.325,6.9 -14.65,6.575 C8.2 -15.425,4.475 ; C9.2@-15.854,4.05 cw(c-15.425,4.046) -15.425,4.475 ; C9.2@-15.854,4.05 cw(c-15.425,4.046) -15.425,4.475 ; C9.2@-15.854,4.05 cw(c-15.425,4.046) -15.425,4.475 ; C9.2@-15.853,4.053 cw(c-14.834,3.034) C8.2@-14.834,4.475 ; C9.2@-15.853,4.053 cw(c-14.834,3.034) C8.2@-14.834,4.475 ; C9.2@-15.853,4.053 cw(c-14.834,3.034) C8.2@-14.834,4.475 ; -14.65,4.771 cw(c-12.946,4.771) E1.1@-14.151,5.976 ; -14.65,4.771 cw(c-12.946,4.771) E1.1@-14.151,5.976 ; -14.65,4.771 cw(c-12.946,4.771) E1.1@-14.151,5.976 ; E1.1@-14.534,6.02 cw(c-15.105,5.667) -14.523,5.331 ; E1.1@-14.534,6.02 cw(c-15.105,5.667) -14.523,5.331 ; E1.1@-14.534,6.02 cw(c-15.105,5.667) -14.523,5.331
NetC11_2: C11.2 C12.2 L3.1 U1.11 | length 19
  Top Layer w0.254: U1.11 -10.25,1.125 -9.3,2.075 L3.1 -8.125,2.425 C12.2 C11.2 ; -9.496,2.061 ccw(c-9.723,2.289) L3.1@-9.417,2.387 ; -9.757,1.618 ccw(c-10.565,2.425) L3.1@-9.423,2.425 ; -9.757,1.618 ccw(c-10.565,2.425) L3.1@-9.423,2.425 ; -9.757,1.618 ccw(c-10.565,2.425) L3.1@-9.423,2.425 ; -9.566,1.892 cw(c-8.887,1.71) L3.1@-9.239,2.318 ; -9.566,1.892 cw(c-8.887,1.71) L3.1@-9.239,2.318 ; -9.566,1.892 cw(c-8.887,1.71) L3.1@-9.239,2.318 ; L3.1@-9.387,2.338 cw(c-9.597,2.128) -9.3,2.128 ; L3.1@-9.387,2.338 cw(c-9.597,2.128) -9.3,2.128 ; L3.1@-9.387,2.338 cw(c-9.597,2.128) -9.3,2.128 ; -9.324,2.051 ccw(c-9.698,2.425) L3.1@-9.169,2.425 ; -9.324,2.051 ccw(c-9.698,2.425) L3.1@-9.169,2.425 ; -9.324,2.051 ccw(c-9.698,2.425) L3.1@-9.169,2.425 ; -9.3,2.128 cw(c-9.003,2.128) L3.1@-9.213,2.338 ; -9.3,2.128 cw(c-9.003,2.128) L3.1@-9.213,2.338 ; -9.3,2.128 cw(c-9.003,2.128) L3.1@-9.213,2.338 ; L3.1@-9.213,2.338 cw(c-9.003,2.128) -9.003,2.425 ; L3.1@-9.213,2.338 cw(c-9.003,2.128) -9.003,2.425 ; L3.1@-9.213,2.338 cw(c-9.003,2.128) -9.003,2.425 ; L3.1@-9.213,2.512 ccw(c-9.003,2.722) -9.003,2.425 ; L3.1@-9.213,2.512 ccw(c-9.003,2.722) -9.003,2.425 ; L3.1@-9.213,2.512 ccw(c-9.003,2.722) -9.003,2.425 ; -8.563,2.425 cw(c-8.563,1.787) C12.2@-8.112,2.238 ; -8.563,2.425 cw(c-8.563,1.787) C12.2@-8.112,2.238 ; -8.563,2.425 cw(c-8.563,1.787) C12.2@-8.112,2.238 ; -8.339,2.369 ccw(c-8.251,2.522) C12.2@-8.118,2.406 ; -8.339,2.369 ccw(c-8.251,2.522) C12.2@-8.118,2.406 ; -8.339,2.369 ccw(c-8.251,2.522) C12.2@-8.118,2.406 ; C12.2@-8.112,2.412 ccw(c-8.322,2.622) -8.025,2.622 ; C12.2@-8.112,2.412 ccw(c-8.322,2.622) -8.025,2.622 ; C12.2@-8.112,2.412 ccw(c-8.322,2.622) -8.025,2.622 ; C11.2@-8.112,3.163 cw(c-8.322,2.953) -8.025,2.953 ; C11.2@-8.112,3.163 cw(c-8.322,2.953) -8.025,2.953 ; C11.2@-8.112,3.163 cw(c-8.322,2.953) -8.025,2.953 ; -8.025,2.622 ccw(c-7.728,2.622) C12.2@-7.938,2.412 ; -8.025,2.622 ccw(c-7.728,2.622) C12.2@-7.938,2.412 ; -8.025,2.622 ccw(c-7.728,2.622) C12.2@-7.938,2.412 ; -8.025,2.953 cw(c-7.728,2.953) C11.2@-7.938,3.163 ; -8.025,2.953 cw(c-7.728,2.953) C11.2@-7.938,3.163 ; -8.025,2.953 cw(c-7.728,2.953) C11.2@-7.938,3.163
NetC16_2: C16.2 U1.19 | length 3.4
  Top Layer w0.254: C16.2 -16.1,-2.075 -15.454,-1.429 -14.604,-1.429 U1.19 ; C16.2@-16.15,-1.952 ccw(c-16.15,-1.534) -15.855,-1.83 ; C16.2@-16.15,-1.952 ccw(c-16.15,-1.534) -15.855,-1.83 ; C16.2@-16.15,-1.952 ccw(c-16.15,-1.534) -15.855,-1.83 ; -14.962,-1.429 ccw(c-14.962,-1.188) U1.19@-14.791,-1.359 ; -14.962,-1.429 ccw(c-14.962,-1.188) U1.19@-14.791,-1.359 ; -14.962,-1.429 ccw(c-14.962,-1.188) U1.19@-14.791,-1.359
NetD1_1: D1.1 R5.2 | length 7
  Top Layer w0.254: D1.1@-5.975,-7.175 -5.875,-7.275 R5.2 ; D1.1@-6.194,-7.219 cw(c-6.966,-7.99) -5.875,-7.99 ; D1.1@-6.194,-7.219 cw(c-6.966,-7.99) -5.875,-7.99 ; D1.1@-6.194,-7.219 cw(c-6.966,-7.99) -5.875,-7.99 ; R5.2@-5.962,-8.263 ccw(c-6.172,-8.053) -5.875,-8.053 ; R5.2@-5.962,-8.263 ccw(c-6.172,-8.053) -5.875,-8.053 ; R5.2@-5.962,-8.263 ccw(c-6.172,-8.053) -5.875,-8.053 ; -5.875,-8.053 ccw(c-5.578,-8.053) R5.2@-5.788,-8.263 ; -5.875,-8.053 ccw(c-5.578,-8.053) R5.2@-5.788,-8.263 ; -5.875,-8.053 ccw(c-5.578,-8.053) R5.2@-5.788,-8.263 ; -5.875,-7.749 cw(c-5.126,-7.749) D1.1@-5.656,-7.219 ; -5.875,-7.749 cw(c-5.126,-7.749) D1.1@-5.656,-7.219 ; -5.875,-7.749 cw(c-5.126,-7.749) D1.1@-5.656,-7.219
NetD2_1: D2.1 R1.2 | length 6.9
  Top Layer w0.254: D2.1@-15.95,-7.175 -15.875,-7.25 R1.2 ; D2.1@-16.092,-7.219 cw(c-16.617,-7.744) -15.875,-7.744 ; D2.1@-16.092,-7.219 cw(c-16.617,-7.744) -15.875,-7.744 ; D2.1@-16.092,-7.219 cw(c-16.617,-7.744) -15.875,-7.744 ; R1.2@-15.962,-8.263 ccw(c-16.172,-8.053) -15.875,-8.053 ; R1.2@-15.962,-8.263 ccw(c-16.172,-8.053) -15.875,-8.053 ; R1.2@-15.962,-8.263 ccw(c-16.172,-8.053) -15.875,-8.053 ; -15.875,-8.053 ccw(c-15.578,-8.053) R1.2@-15.788,-8.263 ; -15.875,-8.053 ccw(c-15.578,-8.053) R1.2@-15.788,-8.263 ; -15.875,-8.053 ccw(c-15.578,-8.053) R1.2@-15.788,-8.263 ; -15.875,-7.995 cw(c-14.778,-7.995) D2.1@-15.554,-7.219 ; -15.875,-7.995 cw(c-14.778,-7.995) D2.1@-15.554,-7.219 ; -15.875,-7.995 cw(c-14.778,-7.995) D2.1@-15.554,-7.219
NetL1_1: L1.1 L2.2 U1.13 | length 3.2
  Top Layer w0.254: L2.2 -12.55,2.4 U1.13 ; L2.2@-12.662,2.338 cw(c-12.932,2.068) -12.55,2.068 ; L2.2@-12.662,2.338 cw(c-12.932,2.068) -12.55,2.068 ; L2.2@-12.662,2.338 cw(c-12.932,2.068) -12.55,2.068
  Top Layer w0.508: L1.1 L2.2
NetL2_1: L2.1 L3.2 U1.12 | length 4.2
  Top Layer w0.254: U1.12 -12.05,1.7 -11.475,2.275 L2.1 ; -11.791,1.959 ccw(c-12.257,2.425) L2.1@-11.598,2.425 ; -11.791,1.959 ccw(c-12.257,2.425) L2.1@-11.598,2.425 ; -11.791,1.959 ccw(c-12.257,2.425) L2.1@-11.598,2.425
  Top Layer w0.508: L2.1 L3.2
NetR2_1: R2.1 U1.16 | length 2.5
  Top Layer w0.254: R2.1 -16.125,0.125 U1.16 ; R2.1@-16.063,0.013 cw(c-15.793,-0.257) -15.793,0.125 ; R2.1@-16.063,0.013 cw(c-15.793,-0.257) -15.793,0.125 ; R2.1@-16.063,0.013 cw(c-15.793,-0.257) -15.793,0.125
RFVCC: C1.1 C14.2 R1.1 SP1.5 U1.7 U1.15 U1.18 U2.5 U2.16 | length 41.3
  Top Layer w0.254: v1@-15.35,-0.875 U1.18 ; U1.7 v1(-9.625,-1.375) ; v1@-15.295,-0.98 cw(c-15.043,-1.232) -15.043,-0.875 ; v1@-15.295,-0.98 cw(c-15.043,-1.232) -15.043,-0.875 ; v1@-15.295,-0.98 cw(c-15.043,-1.232) -15.043,-0.875 ; v1@-15.295,-0.77 ccw(c-15.043,-0.518) -15.043,-0.875 ; v1@-15.295,-0.77 ccw(c-15.043,-0.518) -15.043,-0.875 ; v1@-15.295,-0.77 ccw(c-15.043,-0.518) -15.043,-0.875 ; -9.982,-1.375 ccw(c-9.982,-1.018) v1@-9.73,-1.27 ; -9.982,-1.375 cw(c-9.982,-1.732) v1@-9.73,-1.48 ; -9.982,-1.375 ccw(c-9.982,-1.018) v1@-9.73,-1.27 ; -9.982,-1.375 cw(c-9.982,-1.732) v1@-9.73,-1.48 ; -9.982,-1.375 ccw(c-9.982,-1.018) v1@-9.73,-1.27 ; -9.982,-1.375 cw(c-9.982,-1.732) v1@-9.73,-1.48
  Top Layer w0.508: R1.1@-14.771,-8.35 -14.3,-7.879 C1.1@-14.3,-6.1 ; C1.1 C1.1@-14.3,-6.1 ; v1(-12.375,-6.8) -13.6,-6.8 C1.1@-14.3,-6.1 ; C1.1@-14.173,-5.925 ccw(c-13.444,-5.925) -13.959,-6.441 ; C1.1@-14.173,-5.925 ccw(c-13.444,-5.925) -13.959,-6.441 ; C1.1@-14.173,-5.925 ccw(c-13.444,-5.925) -13.959,-6.441
  Top Layer w0.762: C14.2 -15.425,0.95 ; v1@-15.225,1.15 -13.8,1.15 ; -15.633,0.95 ccw(c-15.633,1.633) v1@-15.15,1.15 ; -15.633,0.95 ccw(c-15.633,1.633) v1@-15.15,1.15 ; -15.633,0.95 ccw(c-15.633,1.633) v1@-15.15,1.15
  Bottom Layer w0.508: v1(-15.225,1.225) -15.4,1.05 v1(-15.4,-0.875) -14.988,-1.288 ; v1(-9.625,-1.375) -10.125,-1.875 -14.4,-1.875 -14.988,-1.288 ; U2.16 U2.5 -15.025,-6.45 -15.55,-5.925 -15.55,-3.825 -15.906,-3.469 -15.906,-2.281 -14.988,-1.363 -14.988,-1.288 ; -15.4,0.752 cw(c-14.752,0.752) v1@-15.21,1.21 ; -15.4,0.752 cw(c-14.752,0.752) v1@-15.21,1.21 ; -15.4,0.752 cw(c-14.752,0.752) v1@-15.21,1.21 ; U2.5@-13.271,-6.45 cw(c-13.271,-7.696) v1@-12.39,-6.815 ; U2.5@-13.271,-6.45 cw(c-13.271,-7.696) v1@-12.39,-6.815 ; U2.5@-13.271,-6.45 cw(c-13.271,-7.696) v1@-12.39,-6.815
SPI_MISO: U1.5 U2.12 | length 5.1
  Top Layer w0.254: U1.5 -11.546,-2.871 -10.279,-2.871 -10.1,-3.05 -9.534,-3.05 -8.925,-3.659 v1@-8.925,-3.85 ; -9.312,-3.272 cw(c-9.89,-3.85) v1@-9.073,-3.85 ; -9.312,-3.272 cw(c-9.89,-3.85) v1@-9.073,-3.85 ; -9.312,-3.272 cw(c-9.89,-3.85) v1@-9.073,-3.85
  other v1: -8.925,-3.85
SPI_MOSI: U1.4 U2.13 | length 9.5
  Top Layer w0.254: U1.4 -12.05,-3.45 -11.971,-3.529 -10.779,-3.529 v1(-10.675,-3.425) ; -11.284,-3.529 ccw(c-11.284,-2.816) v1@-10.78,-3.32 ; -11.284,-3.529 ccw(c-11.284,-2.816) v1@-10.78,-3.32 ; -11.284,-3.529 ccw(c-11.284,-2.816) v1@-10.78,-3.32 ; -11.028,-3.464 cw(c-10.939,-3.619) v1@-10.794,-3.513 ; -11.028,-3.464 cw(c-10.939,-3.619) v1@-10.794,-3.513 ; -11.028,-3.464 cw(c-10.939,-3.619) v1@-10.794,-3.513
  Bottom Layer w0.254: v1(-10.675,-3.425) -10.675,-3.95 -10.125,-4.5 U2.13 ; v1@-10.78,-3.53 cw(c-11.032,-3.782) -10.675,-3.782 ; v1@-10.78,-3.53 cw(c-11.032,-3.782) -10.675,-3.782 ; v1@-10.78,-3.53 cw(c-11.032,-3.782) -10.675,-3.782 ; -10.675,-3.782 cw(c-10.318,-3.782) v1@-10.57,-3.53 ; -10.675,-3.782 cw(c-10.318,-3.782) v1@-10.57,-3.53 ; -10.675,-3.782 cw(c-10.318,-3.782) v1@-10.57,-3.53
SPI_SCK: U1.3 U2.11 | length 12.7
  Top Layer w0.254: U1.3 -12.55,-3.571 -12.121,-4 -10.05,-4 ; v1@-9.775,-3.725 -10.05,-4 ; -10.775,-4 ccw(c-10.775,-2.875) v1@-9.98,-3.67 ; -10.775,-4 ccw(c-10.775,-2.875) v1@-9.98,-3.67 ; -10.775,-4 ccw(c-10.775,-2.875) v1@-9.98,-3.67 ; -10.413,-3.92 cw(c-10.165,-4.35) v1@-9.942,-3.907 ; -10.413,-3.92 cw(c-10.165,-4.35) v1@-9.942,-3.907 ; -10.413,-3.92 cw(c-10.165,-4.35) v1@-9.942,-3.907 ; -10.162,-4 ccw(c-10.162,-3.488) v1@-9.8,-3.85 ; -10.162,-4 ccw(c-10.162,-3.488) v1@-9.8,-3.85 ; -10.162,-4 ccw(c-10.162,-3.488) v1@-9.8,-3.85 ; -10.05,-4 ccw(c-10.164,-3.886) v1@-10.013,-3.828 ; -10.05,-4 ccw(c-10.164,-3.886) v1@-10.013,-3.828 ; -10.05,-4 ccw(c-10.164,-3.886) v1@-10.013,-3.828
  Bottom Layer w0.254: v1@-9.775,-3.725 -9.25,-3.2 U2.11 ; v1@-9.875,-3.627 ccw(c-9.875,-3.149) -9.537,-3.487 ; v1@-9.875,-3.627 ccw(c-9.875,-3.149) -9.537,-3.487 ; v1@-9.875,-3.627 ccw(c-9.875,-3.149) -9.537,-3.487
  other v1: -9.875,-3.775
SWCK: t4.1 U2.20 | length 7.4
  Bottom Layer w0.254: U2.20 -8.02,-8.97 -6.295,-8.97 -5.925,-8.6 ; t4.1 -5.925,-8.6 ; U2.20@-7.58,-8.993 ccw(c-7.484,-8.872) -7.407,-9.006 ; U2.20@-7.58,-8.993 ccw(c-7.484,-8.872) -7.407,-9.006 ; U2.20@-7.58,-8.993 ccw(c-7.484,-8.872) -7.407,-9.006 ; U2.20@-7.573,-9.102 cw(c-7.255,-9.42) -7.255,-8.97 ; U2.20@-7.573,-9.102 cw(c-7.255,-9.42) -7.255,-8.97 ; U2.20@-7.573,-9.102 cw(c-7.255,-9.42) -7.255,-8.97 ; t4.1@-6.133,-8.21 cw(c-6.395,-8.6) -5.925,-8.6 ; t4.1@-6.133,-8.21 cw(c-6.395,-8.6) -5.925,-8.6 ; t4.1@-6.133,-8.21 cw(c-6.395,-8.6) -5.925,-8.6 ; -5.925,-8.6 cw(c-5.455,-8.6) t4.1@-5.717,-8.21 ; -5.925,-8.6 cw(c-5.455,-8.6) t4.1@-5.717,-8.21 ; -5.925,-8.6 cw(c-5.455,-8.6) t4.1@-5.717,-8.21
SWIO: t5.1 U2.19 | length 7.8
  Bottom Layer w0.254: U2.19 -6.95,-8.4 -6.704,-8.154 -6.704,-7.179 t5.1 ; -6.562,-7.037 ccw(c-7.198,-6.4) t5.1@-6.298,-6.4 ; -6.562,-7.037 cw(c-5.925,-7.673) t5.1@-5.925,-6.773 ; -6.562,-7.037 ccw(c-7.198,-6.4) t5.1@-6.298,-6.4 ; -6.562,-7.037 cw(c-5.925,-7.673) t5.1@-5.925,-6.773 ; -6.562,-7.037 ccw(c-7.198,-6.4) t5.1@-6.298,-6.4 ; -6.562,-7.037 cw(c-5.925,-7.673) t5.1@-5.925,-6.773
TX: P1.2 U2.17 | length 5.9
  Bottom Layer w0.381: P1.2@-10.975,-8.1 -10.975,-7.775 -10.3,-7.1 U2.17 ; P1.2@-10.766,-8.1 cw(c-9.475,-8.1) -10.388,-7.188 ccw(c-9.475,-8.1) P1.2@-10.766,-8.1
  Bottom Layer w0.508: P1.2 P1.2@-10.975,-8.1
XC1: C13.2 R3.1 U1.10 Y1.3 | length 23.4
  Top Layer w0.254: U1.10 -9.175,0.125 R3.1 ; C13.2 R3.1 ; Y1.3 -7.85,0.375 R3.1 ; -9.826,0.125 ccw(c-9.826,1.276) R3.1@-9.012,0.462 ; -9.826,0.125 ccw(c-9.826,1.276) R3.1@-9.012,0.462 ; -9.826,0.125 ccw(c-9.826,1.276) R3.1@-9.012,0.462 ; -9.468,0.199 cw(c-9.147,-0.359) R3.1@-8.961,0.257 ; -9.468,0.199 cw(c-9.147,-0.359) R3.1@-8.961,0.257 ; -9.468,0.199 cw(c-9.147,-0.359) R3.1@-8.961,0.257 ; -9.212,0.125 ccw(c-9.212,0.662) R3.1@-8.832,0.282 ; -9.212,0.125 ccw(c-9.212,0.662) R3.1@-8.832,0.282 ; -9.212,0.125 ccw(c-9.212,0.662) R3.1@-8.832,0.282 ; R3.1@-9.012,0.462 ccw(c-9.222,0.672) -8.925,0.672 ; R3.1@-9.012,0.462 ccw(c-9.222,0.672) -8.925,0.672 ; R3.1@-9.012,0.462 ccw(c-9.222,0.672) -8.925,0.672 ; C13.2@-9.012,1.288 cw(c-9.222,1.078) -8.925,1.078 ; C13.2@-9.012,1.288 cw(c-9.222,1.078) -8.925,1.078 ; C13.2@-9.012,1.288 cw(c-9.222,1.078) -8.925,1.078 ; -8.925,0.672 ccw(c-8.628,0.672) R3.1@-8.838,0.462 ; -8.925,0.672 ccw(c-8.628,0.672) R3.1@-8.838,0.462 ; -8.925,0.672 ccw(c-8.628,0.672) R3.1@-8.838,0.462 ; -8.925,1.078 cw(c-8.628,1.078) C13.2@-8.838,1.288 ; -8.925,1.078 cw(c-8.628,1.078) C13.2@-8.838,1.288 ; -8.925,1.078 cw(c-8.628,1.078) C13.2@-8.838,1.288 ; R3.1@-8.863,0.268 cw(c-8.628,-0.14) -8.506,0.316 ; R3.1@-8.863,0.268 cw(c-8.628,-0.14) -8.506,0.316 ; R3.1@-8.863,0.268 cw(c-8.628,-0.14) -8.506,0.316 ; R3.1@-8.838,0.288 cw(c-8.628,0.078) -8.628,0.375 ; R3.1@-8.838,0.288 cw(c-8.628,0.078) -8.628,0.375 ; R3.1@-8.838,0.288 cw(c-8.628,0.078) -8.628,0.375 ; R3.1@-8.838,0.462 ccw(c-8.628,0.672) -8.628,0.375 ; R3.1@-8.838,0.462 ccw(c-8.628,0.672) -8.628,0.375 ; R3.1@-8.838,0.462 ccw(c-8.628,0.672) -8.628,0.375 ; R3.1@-8.727,0.375 cw(c-8.727,-1.052) Y1.3@-7.718,-0.043 ; R3.1@-8.727,0.375 cw(c-8.727,-1.052) Y1.3@-7.718,-0.043 ; R3.1@-8.727,0.375 cw(c-8.727,-1.052) Y1.3@-7.718,-0.043 ; -8.226,0.25 ccw(c-8.027,0.595) Y1.3@-7.729,0.331 ; -8.226,0.25 ccw(c-8.027,0.595) Y1.3@-7.729,0.331 ; -8.226,0.25 ccw(c-8.027,0.595) Y1.3@-7.729,0.331 ; -8.114,0.375 cw(c-8.114,-0.439) Y1.3@-7.538,0.137 ; -8.114,0.375 cw(c-8.114,-0.439) Y1.3@-7.538,0.137 ; -8.114,0.375 cw(c-8.114,-0.439) Y1.3@-7.538,0.137 ; -7.957,0.095 ccw(c-7.789,0.384) Y1.3@-7.539,0.163 ; -7.957,0.095 ccw(c-7.789,0.384) Y1.3@-7.539,0.163 ; -7.957,0.095 ccw(c-7.789,0.384) Y1.3@-7.539,0.163
XC2: C17.2 R3.2 U1.9 Y1.1 | length 24.6
  Top Layer w0.254: U1.9 -9.275,-0.375 R3.2 ; R3.2@-8.816,-0.669 ccw(c-8.529,-0.522) -8.529,-0.844 ; C17.2 -8.9,-1.525 -8.9,-0.75 R3.2 ; Y1.1 -6.975,-1 -8.65,-1 R3.2 ; R3.2@-9.135,-0.515 ccw(c-8.925,-0.305) R3.2@-8.925,-0.602 ; R3.2@-9.135,-0.515 cw(c-9.345,-0.725) R3.2@-9.048,-0.725 ; R3.2@-9.135,-0.515 ccw(c-8.925,-0.305) R3.2@-8.925,-0.602 ; R3.2@-9.135,-0.515 cw(c-9.345,-0.725) R3.2@-9.048,-0.725 ; R3.2@-9.135,-0.515 ccw(c-8.925,-0.305) R3.2@-8.925,-0.602 ; R3.2@-9.135,-0.515 cw(c-9.345,-0.725) R3.2@-9.048,-0.725 ; R3.2@-9.018,-0.818 ccw(c-8.577,-0.377) -8.577,-1 ; R3.2@-9.018,-0.818 ccw(c-8.577,-0.377) -8.577,-1 ; R3.2@-9.018,-0.818 ccw(c-8.577,-0.377) -8.577,-1 ; R3.2@-9.012,-0.812 cw(c-9.282,-1.082) -8.9,-1.082 ; R3.2@-9.012,-0.812 cw(c-9.282,-1.082) -8.9,-1.082 ; R3.2@-9.012,-0.812 cw(c-9.282,-1.082) -8.9,-1.082 ; R3.2@-8.925,-0.848 cw(c-8.925,-1.145) R3.2@-8.715,-0.935 ; R3.2@-8.925,-0.848 cw(c-8.925,-1.145) R3.2@-8.715,-0.935 ; R3.2@-8.925,-0.848 cw(c-8.925,-1.145) R3.2@-8.715,-0.935 ; -8.9,-1.087 ccw(c-8.262,-1.087) C17.2@-8.713,-1.538 ; -8.9,-1.087 ccw(c-8.262,-1.087) C17.2@-8.713,-1.538 ; -8.9,-1.087 ccw(c-8.262,-1.087) C17.2@-8.713,-1.538 ; R3.2@-8.893,-0.844 cw(c-8.711,-1.522) -8.36,-0.914 ; R3.2@-8.893,-0.844 cw(c-8.711,-1.522) -8.36,-0.914 ; R3.2@-8.893,-0.844 cw(c-8.711,-1.522) -8.36,-0.914 ; C17.2@-8.881,-1.532 ccw(c-8.997,-1.399) -8.844,-1.311 ; C17.2@-8.881,-1.532 ccw(c-8.997,-1.399) -8.844,-1.311 ; C17.2@-8.881,-1.532 ccw(c-8.997,-1.399) -8.844,-1.311 ; R3.2@-8.838,-0.638 ccw(c-7.964,0.236) -7.964,-1 ; R3.2@-8.838,-0.638 ccw(c-7.964,0.236) -7.964,-1 ; R3.2@-8.838,-0.638 ccw(c-7.964,0.236) -7.964,-1 ; R3.2@-8.804,-0.745 ccw(c-8.543,-0.787) -8.675,-1.015 ; R3.2@-8.804,-0.745 ccw(c-8.543,-0.787) -8.675,-1.015 ; R3.2@-8.804,-0.745 ccw(c-8.543,-0.787) -8.675,-1.015 ; R3.2@-8.802,-0.725 ccw(c-8.505,-0.725) R3.2@-8.715,-0.935 ; R3.2@-8.802,-0.725 ccw(c-8.505,-0.725) R3.2@-8.715,-0.935 ; R3.2@-8.802,-0.725 ccw(c-8.505,-0.725) R3.2@-8.715,-0.935 ; -6.462,-1.513 ccw(c-5.825,-0.877) Y1.1@-5.825,-1.777 ; -6.462,-1.513 ccw(c-5.825,-0.877) Y1.1@-5.825,-1.777 ; -6.462,-1.513 ccw(c-5.825,-0.877) Y1.1@-5.825,-1.777 ; -6.262,-1.66 cw(c-6.419,-2.246) Y1.1@-5.843,-2.056 ; -6.262,-1.66 cw(c-6.419,-2.246) Y1.1@-5.843,-2.056 ; -6.262,-1.66 cw(c-6.419,-2.246) Y1.1@-5.843,-2.056 ; Y1.1@-6.22,-1.755 cw(c-6.516,-2.05) Y1.1@-6.098,-2.05 ; Y1.1@-6.22,-1.755 cw(c-6.516,-2.05) Y1.1@-6.098,-2.05 ; Y1.1@-6.22,-1.755 cw(c-6.516,-2.05) Y1.1@-6.098,-2.05
pads on no net: E1.2 SP1.4 U2.4 U2.8 U2.18 Y1.2 Y1.4

## Polygon pours and split planes (outlines as drawn)
GND on Top Layer "Keep-Out Layer-No Net" (solid, remove dead copper, pour order 6): -17.925,10.425 -17.2,9.7 -2.125,9.7 -2.125,-11.35 -3.075,-12.3 -3.775,-11.6 -17.8,-11.6
GND on Bottom Layer "Keep-Out Layer-No Net" (solid, remove dead copper, pour order 8): -16.6,9.85 -2.25,9.85 -1.6,10.5 -2.275,9.825 -2.275,-11.15 -17.925,-11.15 -18.425,-10.65

## Keep-outs
Keep-Out Layer:
  lines w0.254: -5,6.375 -1.025,6.375 ; -5,6.4 ccw(c-7,6.4) -7,8.4 -15,8.4 ccw(c-15,6.4) -17,6.4 -17,-7.6 ccw(c-15,-7.6) -15,-9.6 -7,-9.6 ccw(c-7,-7.6) -5,-7.6 -5,5.125 -1,5.125 -1,-6.35 4,-6.35 4,10.4 -1,10.4 -1,6.375

## Other copper
Top Layer:
  pour cut-out: -13.35,2.8 -17.025,2.8 -17,2.825 -17,6.975 -16.75,7.35 -16.65,7.625 -16.5,7.725 -15.95,8.25 -15.55,8.325 -15.375,8.4 -6.325,8.4 -5.675,7.825 -5.45,7.725 -5.375,7.5 -5.125,7.1 -4.975,5.25 -5,2.825 -5,2.725
  pour cut-out: -13.525,-9.6 -13.525,-7.225 -8.5,-7.225 -8.5,-9.6
Bottom Layer:
  pour cut-out: -13.35,2.8 -17.025,2.8 -17,2.825 -17,6.975 -16.75,7.35 -16.65,7.625 -16.5,7.725 -15.95,8.25 -15.55,8.325 -15.375,8.4 -6.325,8.4 -5.675,7.825 -5.45,7.725 -5.375,7.5 -5.125,7.1 -4.975,5.25 -5,2.825 -5,2.725